# Altium PCB Screw Terminal PCB.PcbDoc
Units mm, origin at the board's own origin, x right, y up, seen from the top; angles counter-clockwise.
Board outline 167.5 x 96 mm, 2 copper layers (Top Layer, Bottom Layer), stack 1.671 mm thick; 8 components, 67 nets, 144 pads, 0 vias.
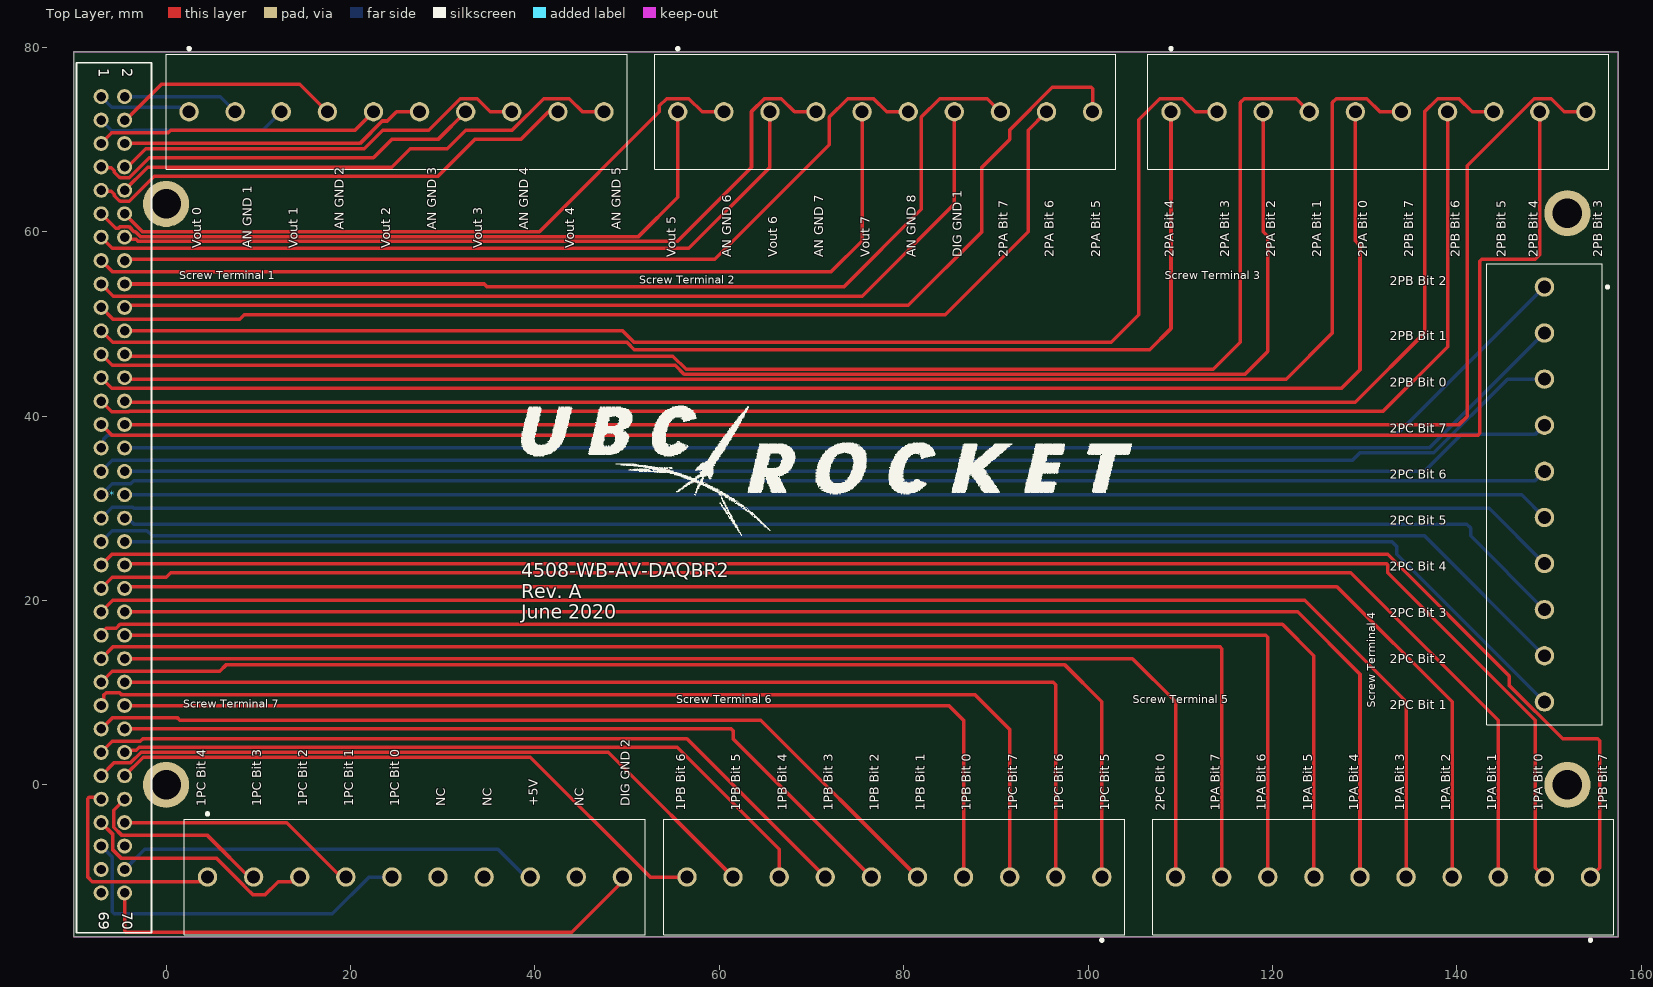
[diagram p0: Top Layer view]
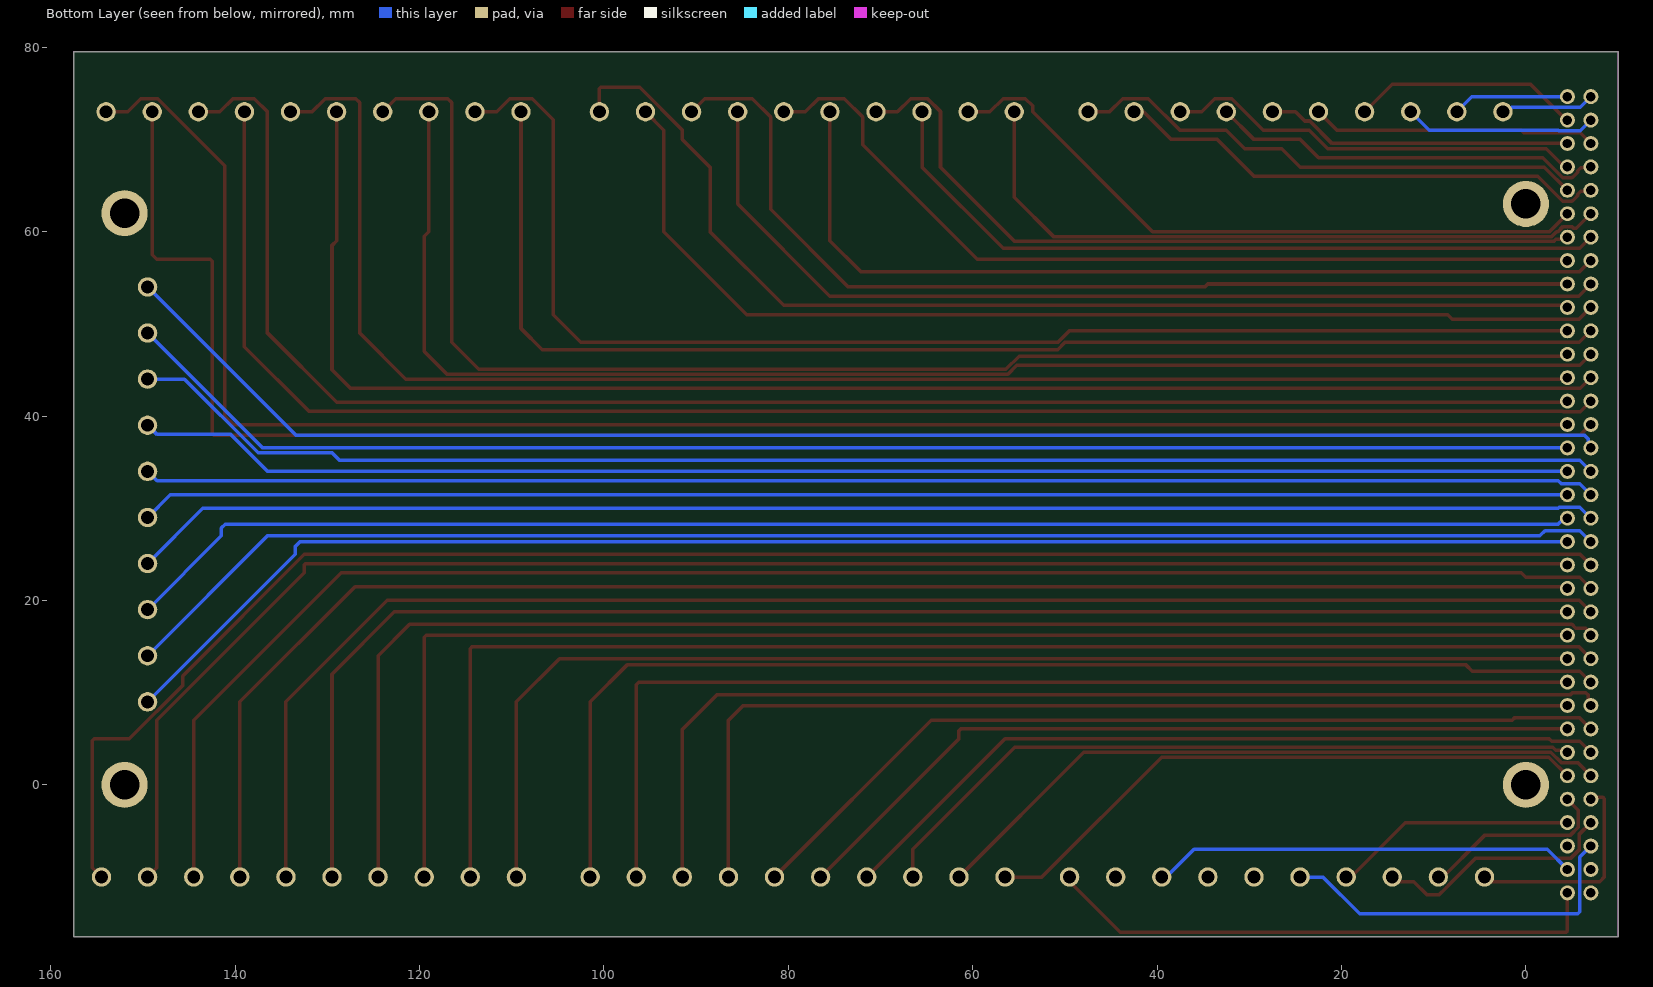
[diagram p1: Bottom Layer view, seen from below]
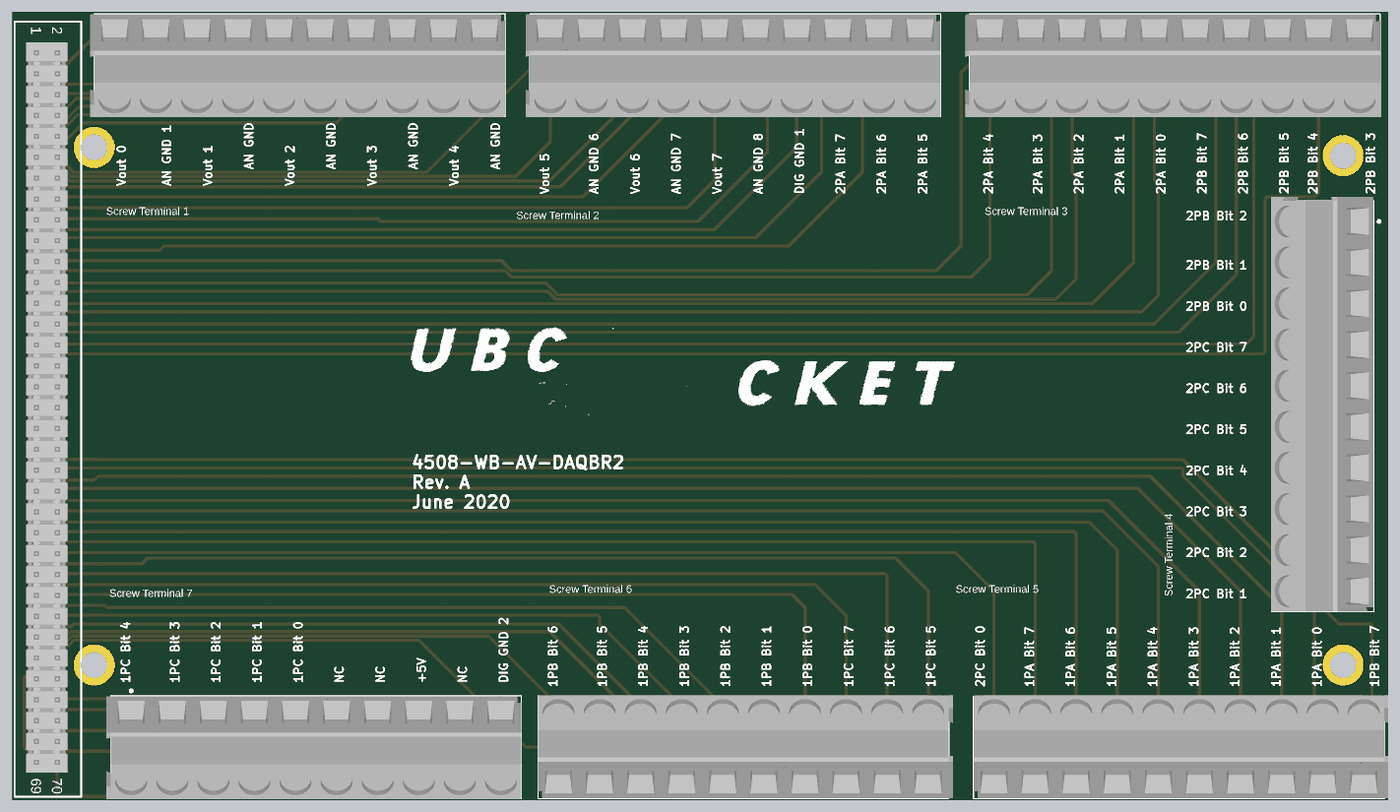
[diagram p2: 3D render of the assembled board from above, using the file's embedded part models]

## Layer stack, top to bottom
Top Solder: solder mask 0.0102, Solder Resist, Dk 3.5
Top Layer: signal copper 0.0356
Dielectric 1: dielectric 1.6, FR-4, Dk 4.8
Bottom Layer: signal copper 0.0356
Bottom Solder: solder mask 0.0102, Solder Resist, Dk 3.5

## Board outline
157.5,79.5 157.5,-16.5 -10,-16.5 -10,79.5

## Design rules (kind name [scope] priority, off if disabled: settings)
Clearance [All] p1: gap=0.152 ignorepadtopadclearanceinfootprint=FALSE except(0: Arc-Hole Track-Hole SMDPad-Hole THPad-Hole Via-Hole Fill-Hole Poly-Hole Region-Hole Text-Hole)
ComponentClearance [All] p1: gap=0 collisioncheckmode=3 verticalgap=0.003 showdistances=FALSE
HoleSize [All] p1: absolutevalues=TRUE maxlimit=25.4 minlimit=0.025 maxpercent=80.000 minpercent=20.000
MinimumSolderMaskSliver [All] p1: minsoldermaskwidth=0.025
PolygonConnect [All] p1: connectstyle=Direct reliefconductorwidth=0.254 reliefentries=4 polygonreliefangle="90 Angle" airgapwidth=0.254
RoomDefinition BMS_REV_A1 [InComponentClass('BMS_REV_A1')] p1: confinementstyle=ConfineIn formatcopy=TRUE lockcomponents=FALSE outline -3.301,-112.466 99.099,-112.466 99.099,-43.967 -3.301,-43.967
RoutingVias [All] p1: holewidth=0.2 width=0.505 viastyle="Through Hole" minholewidth=0.2 minwidth=0.505 maxholewidth=0.711 maxwidth=1.27
SilkToSilkClearance [All] p1: silktosilkclearance=0.025
SilkToSolderMaskClearance [IsPad] p1: minsilkscreentomaskgap=0.025 clearancetoexposedcopper=TRUE
SolderMaskExpansion [All] p1: expansion=0.102 istentingtop=FALSE
Width [All] p1: maxlimit=5.08 minlimit=0.254 preferedwidth=0.381
25 further rules are at their usual default settings.

## Components (designator, comment, footprint, x,y, rotation, side; value= is the part's Value field where it differs from the comment)
* "Header to screw terminals" Header -5.77,31.46 r270 top
"Screw Terminal 1" "1-10" "SCREW TERMINAL" 25,73 r0 top (schematic designator ST1)
"Screw Terminal 2" "10-20" "SCREW TERMINAL" 78,73 r0 top (schematic designator ST2)
"Screw Terminal 3" "20-30" "SCREW TERMINAL" 131.5,73 r0 top (schematic designator ST3)
"Screw Terminal 4" "30-40" "SCREW TERMINAL" 149.5,31.5 r270 top (schematic designator ST4)
"Screw Terminal 5" "40-50" "SCREW TERMINAL" 132,-10 r180 top (schematic designator ST5)
"Screw Terminal 6" "50-60" "SCREW TERMINAL" 79,-10 r180 top (schematic designator ST6)
"Screw Terminal 7" "60-70" "SCREW TERMINAL" 27,-10 r0 top (schematic designator ST7)

## Footprints (in the part's own frame and the unit in brackets; to place one, negate y for a bottom-side part, rotate by r counter-clockwise, add the part's x,y. Pads: shape width x height; smd on the part's side, far side on the other; paste and mask are expansions set on the pad)
Header [mm]
  round 1.62 hole 1.02: 1(-43.18,-1.27) 2(-43.18,1.27) 3(-40.64,-1.27) 4(-40.64,1.27) 5(-38.1,-1.27) 6(-38.1,1.27) 7(-35.56,-1.27) 8(-35.56,1.27) 9(-33.02,-1.27) 10(-33.02,1.27) 11(-30.48,-1.27) 12(-30.48,1.27) 13(-27.94,-1.27) 14(-27.94,1.27) 15(-25.4,-1.27) 16(-25.4,1.27) 17(-22.86,-1.27) 18(-22.86,1.27) 19(-20.32,-1.27) 20(-20.32,1.27) 21(-17.78,-1.27) 22(-17.78,1.27) 23(-15.24,-1.27) 24(-15.24,1.27) 25(-12.7,-1.27) 26(-12.7,1.27) 27(-10.16,-1.27) 28(-10.16,1.27) 29(-7.62,-1.27) 30(-7.62,1.27) 31(-5.08,-1.27) 32(-5.08,1.27) 33(-2.54,-1.27) 34(-2.54,1.27) 35(0,-1.27) 36(0,1.27) 37(2.54,-1.27) 38(2.54,1.27) 39(5.08,-1.27) 40(5.08,1.27) 41(7.62,-1.27) 42(7.62,1.27) 43(10.16,-1.27) 44(10.16,1.27) 45(12.7,-1.27) 46(12.7,1.27) 47(15.24,-1.27) 48(15.24,1.27) 49(17.78,-1.27) 50(17.78,1.27) 51(20.32,-1.27) 52(20.32,1.27) 53(22.86,-1.27) 54(22.86,1.27) 55(25.4,-1.27) 56(25.4,1.27) 57(27.94,-1.27) 58(27.94,1.27) 59(30.48,-1.27) 60(30.48,1.27) 61(33.02,-1.27) 62(33.02,1.27) 63(35.56,-1.27) 64(35.56,1.27) 65(38.1,-1.27) 66(38.1,1.27) 67(40.64,-1.27) 68(40.64,1.27) 69(43.18,-1.27) 70(43.18,1.27)
  silkscreen extent -46.86,-3.94 47.5,4.19, body extent -44.32,-2.51 44.58,2.51, height 7.89
"SCREW TERMINAL" [mm]
  round 2.1 hole 1.4: 1(-22.5,0) 2(-17.5,0) 3(-12.5,0) 4(-7.5,0) 5(-2.5,0) 6(2.5,0) 7(7.5,0) 8(12.5,0) 9(17.5,0) 10(22.5,0)
  silkscreen extent -25,-6.25 25,6.95, body extent -25.5,-6.31 25,6.19, height 10.51

## Part data
*: library part Header
"Screw Terminal 1" "Screw Terminal 2" "Screw Terminal 3" "Screw Terminal 4" "Screw Terminal 5" "Screw Terminal 6" "Screw Terminal 7": library part "Screw Terminal"

## Free pads (board coordinates)
  round 5 hole 3.2: ""(0,0) ""(0,63) ""(152,0) ""(152,62)

## Nets (pads, with @x,y where several pads share a name; then routed paths per layer and width w, separated by ;. In a path a pad name is that pad's centre, name@x,y a point inside that pad or via, vN(x,y) a via of type N, cw(c..) or ccw(c..) an arc to the next point about the centre after c; other vN are vias at no path point)
+5V: "Screw Terminal 7.8" *.68 | length 46.4
  Bottom Layer w0.381: *.68 -2.32,-7 36,-7 39,-10 39.5,-10.5
"Analog Ground 1": "Screw Terminal 1.2" *.2 | length 12.7
  Bottom Layer w0.381: *.2 5.86,74.64 7.5,73
"Analog Ground 2": "Screw Terminal 1.4" *.4 | length 24.9
  Top Layer w0.381: *.4 -4.4,72.1 -0.5,76 14.5,76 17.5,73
"Analog Ground 3": "Screw Terminal 1.6" *.6 | length 33.4
  Top Layer w0.381: *.6 21.03,69.56 23.47,72 24,72 25,73 27.5,73
"Analog Ground 4": "Screw Terminal 1.8" *.8 | length 45.7
  Top Layer w0.381: *.8 -4.165,67.02 -2.185,69 21.5,69 23.5,71 28.476,71 31.907,74.431 33.738,74.431 35.169,73 37.5,73
"Analog Ground 5": "Screw Terminal 1.10" *.10 | length 56.7
  Top Layer w0.381: *.10 -1.98,67 24.5,67 26.5,69 30.5,69 32.5,71 37.524,71 40.955,74.431 43.738,74.431 45.169,73 47.5,73
"Analog Ground 6": "Screw Terminal 2.2" *.12 | length 72.7
  Top Layer w0.381: *.12 -2.56,60 40.5,60 53.5,73 53.5,73.639 54.292,74.431 56.708,74.431 58.139,73 60.5,73
"Analog Ground 7": "Screw Terminal 2.4" *.14 | length 85.7
  Top Layer w0.381: *.14 -4.263,59.163 -3.232,59.163 -3.002,58.933 55.433,58.933 63.5,67 63.5,73.024 64.907,74.431 66.738,74.431 68.169,73 70.5,73
"Analog Ground 8": "Screw Terminal 2.6" *.16 | length 94.6
  Top Layer w0.381: *.16 -4.36,57 59.5,57 71.931,69.431 71.931,72.431 73.931,74.431 76.738,74.431 78.169,73 80.5,73
"Digital Ground 1": "Screw Terminal 2.7" *.17 | length 107.2
  Top Layer w0.381: *.17 -5.72,53 75.5,53 85.5,63 85.5,73
"Digital Ground 2": "Screw Terminal 7.10" *.70 | length 60.5
  Top Layer w0.381: *.70 -4.5,-15.851 -4.351,-16 44,-16 49.5,-10.5
"FIRSTPORTA Bit 0": "Screw Terminal 5.9" *.49 | length 147
  Top Layer w0.381: *.49 -5.72,15 114.277,15 114.5,14.777 114.5,-10
"FIRSTPORTA Bit 1": "Screw Terminal 5.8" *.48 | length 150.1
  Top Layer w0.381: *.48 119.28,16.22 119.5,16 119.5,-10
"FIRSTPORTA Bit 2": "Screw Terminal 5.7" *.47 | length 157.6
  Top Layer w0.381: *.47 -7.04,16.46 -6.5,17 -5.404,17 -4.993,17.411 121.089,17.411 124.5,14 124.5,-10
"FIRSTPORTA Bit 3": "Screw Terminal 5.6" *.46 | length 158.8
  Top Layer w0.381: *.46 122.74,18.76 129.5,12 129.5,-10
"FIRSTPORTA Bit 4": "Screw Terminal 5.5" *.45 | length 165.6
  Top Layer w0.381: *.45 -5.789,20.011 123.489,20.011 134.5,9 134.5,-10
"FIRSTPORTA Bit 5": "Screw Terminal 5.4" *.44 | length 168.3
  Top Layer w0.381: *.44 -4.3,21.5 127,21.5 139.5,9 139.5,-10
"FIRSTPORTA Bit 6": "Screw Terminal 5.3" *.43 | length 175.9
  Top Layer w0.381: *.43 -5.832,22.508 0.008,22.508 0.5,23 128.5,23 144.5,7 144.5,-10
"FIRSTPORTA Bit 7": "Screw Terminal 5.2" *.42 | length 178
  Top Layer w0.381: *.42 -4.34,24 132.351,24 132.5,23.851 132.5,23 148.5,7 148.5,-9 149.5,-10
"FIRSTPORTB Bit 0": "Screw Terminal 6.7" *.57 | length 85.4
  Top Layer w0.381: *.57 -5.849,4.711 -2.789,4.711 -2.5,5 56.5,5 71.5,-10
"FIRSTPORTB Bit 1": "Screw Terminal 6.6" *.56 | length 88.2
  Top Layer w0.381: *.56 61.291,6.06 61.5,5.851 61.5,5 76.5,-10
"FIRSTPORTB Bit 2": "Screw Terminal 6.5" *.55 | length 96.2
  Top Layer w0.381: *.55 -5.849,7.251 1.249,7.251 1.5,7 64.5,7 81.5,-10
"FIRSTPORTB Bit 3": "Screw Terminal 6.4" *.54 | length 108.7
  Top Layer w0.381: *.54 84.9,8.6 86.5,7 86.5,-10
"FIRSTPORTB Bit 4": "Screw Terminal 6.3" *.53 | length 117.3
  Top Layer w0.381: *.53 -6.779,8.861 -6.779,9.717 -6.498,9.998 -5.042,9.998 -4.835,9.791 87.709,9.791 91.5,6 91.5,-10
"FIRSTPORTB Bit 5": "Screw Terminal 6.2" *.52 | length 122
  Top Layer w0.381: *.52 96.211,11.14 96.5,10.851 96.5,-10
"FIRSTPORTB Bit 6": "Screw Terminal 6.1" *.51 | length 130
  Top Layer w0.381: *.51 -5.849,12.331 5.831,12.331 6.5,13 97.5,13 101.5,9 101.5,-10
"FIRSTPORTB Bit 7": "Screw Terminal 5.10" *.50 | length 134.9
  Top Layer w0.381: *.50 104.82,13.68 109.5,9 109.5,-10
"FIRSTPORTC Bit 0": "Screw Terminal 7.5" *.65 | length 39.7
  Bottom Layer w0.381: *.65 -5.849,-7.831 -5.849,-13.777 -5.626,-14 18.024,-14 22.024,-10 24.5,-10
"FIRSTPORTC Bit 1": "Screw Terminal 7.4" *.64 | length 26.7
  Top Layer w0.381: *.64 13.1,-4.1 19.5,-10.5
"FIRSTPORTC Bit 2": "Screw Terminal 7.3" *.63 | length 26.4
  Top Layer w0.381: *.63 -5.807,-5.333 -5.807,-7.017 -4.835,-7.989 5.489,-7.989 8.345,-10.845 ccw(c9.5,-10) 8.655,-11.155 9.431,-11.931 10.738,-11.931 12.169,-10.5 14.5,-10.5
"FIRSTPORTC Bit 3": "Screw Terminal 7.2" *.62 | length 21.2
  Top Layer w0.381: *.62 -5.691,-2.751 -5.691,-4.593 -4.835,-5.449 4.449,-5.449 9.5,-10.5
"FIRSTPORTC Bit 4": "Screw Terminal 7.1" *.61 | length 23.3
  Top Layer w0.381: *.61 -7.241,-1.359 -8.351,-1.359 -8.5,-1.508 -8.5,-10 -8,-10.5 4.5,-10.5
"FIRSTPORTC Bit 5": "Screw Terminal 6.10" *.60 | length 67.2
  Top Layer w0.381: *.60 -2.48,3 39.5,3 52.5,-10 56.5,-10
"FIRSTPORTC Bit 6": "Screw Terminal 6.9" *.59 | length 75.2
  Top Layer w0.381: *.59 -5.653,2.367 -3.867,2.367 -2.701,3.533 47.967,3.533 61.5,-10
"FIRSTPORTC Bit 7": "Screw Terminal 6.8" *.58 | length 78.8
  Top Layer w0.381: *.58 -4.263,3.757 -3.232,3.757 -2.922,4.067 55.433,4.067 66.5,-7 66.5,-10
"SECONDPORTA Bit 0": "Screw Terminal 3.5" *.25 | length 166.1
  Top Layer w0.381: *.25 -5.88,43 127.5,43 129.5,45 129.5,58.5 129,59 129,73
"SECONDPORTA Bit 1": "Screw Terminal 3.4" *.24 | length 157.2
  Top Layer w0.381: *.24 -4.3,46.5 54.975,46.5 56.408,45.067 113.567,45.067 116.5,48 116.5,74 116.931,74.431 122.569,74.431 124,73
"SECONDPORTA Bit 2": "Screw Terminal 3.3" *.23 | length 154.7
  Top Layer w0.381: *.23 -5.84,45.5 55.214,45.5 56.181,44.533 117.033,44.533 119.5,47 119.5,59.5 119,60 119,73
"SECONDPORTA Bit 3": "Screw Terminal 3.2" *.22 | length 142.9
  Top Layer w0.381: *.22 49.513,49.24 50.753,48 102.5,48 105.5,51 105.5,72.139 107.792,74.431 110.208,74.431 111.639,73 114,73
"SECONDPORTA Bit 4": "Screw Terminal 3.1" *.21 | length 141.3
  Top Layer w0.381: *.21 -5.8,48 49.999,48 50.791,47.208 106.708,47.208 109,49.5 109,73
"SECONDPORTA Bit 5": "Screw Terminal 2.10" *.20 | length 122.1
  Top Layer w0.381: *.20 -4.28,52 80.5,52 88.5,60 88.5,67 91.5,70 91.5,71.024 96.117,75.641 100.351,75.641 100.5,75.492 100.5,73
"SECONDPORTA Bit 6": "Screw Terminal 2.9" *.19 | length 118.8
  Top Layer w0.381: *.19 -5.76,50.5 8,50.5 8.5,51 84.5,51 93.5,60 93.5,71 95.5,73
"SECONDPORTA Bit 7": "Screw Terminal 2.8" *.18 | length 110
  Top Layer w0.381: *.18 34.525,54.32 34.845,54 73.5,54 81.931,62.431 81.931,72.431 83.931,74.431 89.069,74.431 90.5,73
"SECONDPORTB Bit 0": "Screw Terminal 4.3" *.33 | length 160.7
  Bottom Layer w0.381: *.33 -5.849,35.191 128.691,35.191 129.5,36 137.5,36 145.5,44 149.5,44
"SECONDPORTB Bit 1": "Screw Terminal 4.2" *.32 | length 159.2
  Bottom Layer w0.381: *.32 137.04,36.54 149.5,49
"SECONDPORTB Bit 2": "Screw Terminal 4.1" *.31 | length 164.2
  Bottom Layer w0.381: *.31 -6.779,36.801 -6.779,37.499 -6.389,37.889 133.389,37.889 149.5,54
"SECONDPORTB Bit 3": "Screw Terminal 3.10" *.30 | length 189.7
  Top Layer w0.381: *.30 140.243,39.08 141.118,39.954 141.118,67.141 148.407,74.431 150.238,74.431 151.669,73 154,73
"SECONDPORTB Bit 4": "Screw Terminal 3.9" *.29 | length 191.1
  Top Layer w0.381: *.29 -5.849,37.889 142.277,37.889 142.5,38.112 142.5,56.777 142.723,57 148.5,57 149,57.5 149,73
"SECONDPORTB Bit 5": "Screw Terminal 3.8" *.28 | length 176.8
  Top Layer w0.381: *.28 -4.38,41.5 129,41.5 136.5,49 136.5,73 137.931,74.431 140.238,74.431 141.669,73 144,73
"SECONDPORTB Bit 6": "Screw Terminal 3.7" *.27 | length 174.9
  Top Layer w0.381: *.27 -5.887,40.467 -4.022,40.467 -3.99,40.5 132,40.5 139,47.5 139,73
"SECONDPORTB Bit 7": "Screw Terminal 3.6" *.26 | length 166.4
  Top Layer w0.381: *.26 -4.34,44 121.5,44 126.5,49 126.5,74 126.931,74.431 130.238,74.431 131.669,73 134,73
"SECONDPORTC Bit 0": "Screw Terminal 5.1" *.41 | length 187.2
  Top Layer w0.381: *.41 -5.849,25.031 0.469,25.031 0.5,25 132.5,25 145.704,11.796 145.704,10.773 151.476,5 155.277,5 155.5,4.777 155.5,-9 154.5,-10
"SECONDPORTC Bit 1": "Screw Terminal 4.10" *.40 | length 161.7
  Bottom Layer w0.381: *.40 132.971,26.38 133.5,25.851 133.5,25 149.5,9
"SECONDPORTC Bit 2": "Screw Terminal 4.9" *.39 | length 162.7
  Bottom Layer w0.381: *.39 -5.849,27.571 -2.071,27.571 -1.5,27 136.5,27 149.5,14
"SECONDPORTC Bit 3": "Screw Terminal 4.8" *.38 | length 158.6
  Bottom Layer w0.381: *.38 -4.146,28.92 -3.481,28.255 141.096,28.255 141.5,27.851 141.5,27 149.5,19
"SECONDPORTC Bit 4": "Screw Terminal 4.7" *.37 | length 159.6
  Bottom Layer w0.381: *.37 -5.849,30.111 -3.611,30.111 -3.5,30 143.5,30 149.5,24
"SECONDPORTC Bit 5": "Screw Terminal 4.6" *.36 | length 155
  Bottom Layer w0.381: *.36 147.04,31.46 149.5,29
"SECONDPORTC Bit 6": "Screw Terminal 4.5" *.35 | length 157.6
  Bottom Layer w0.381: *.35 -5.849,32.651 -3.849,32.651 -3.5,33 148.476,33 149.476,34 149.5,34
"SECONDPORTC Bit 7": "Screw Terminal 4.4" *.34 | length 156.1
  Bottom Layer w0.381: *.34 136.5,34 140.5,38 148.476,38 149.476,39 149.5,39
"Vout 0": "Screw Terminal 1.1" *.1 | length 10.2
  Bottom Layer w0.381: *.1 -5.887,73.487 -4.022,73.487 -4.01,73.5 1.535,73.5 2.035,73 2.5,73
"Vout 1": "Screw Terminal 1.3" *.3 | length 20.9
  Bottom Layer w0.381: *.3 -5.887,70.947 -3.553,70.947 -3.5,71 10.5,71 12.5,73
"Vout 2": "Screw Terminal 1.5" *.5 | length 31
  Top Layer w0.381: *.5 -5.887,70.713 0.213,70.713 0.5,71 20.5,71 22.5,73
"Vout 3": "Screw Terminal 1.7" *.7 | length 43.1
  Top Layer w0.381: *.7 -6.949,66.929 -5.939,66.929 -5.617,66.607 -5.617,66.453 -5.342,66.178 -4.993,65.829 -4.5,65.829 -4.007,65.829 -3.658,66.178 -1.836,68 22.5,68 24.5,70 29.5,70 32.5,73
"Vout 4": "Screw Terminal 1.9" *.9 | length 54.1
  Top Layer w0.381: *.9 -6.949,64.389 -5.939,64.389 -5.617,64.067 -5.617,63.913 -5.342,63.638 -4.993,63.289 -4.5,63.289 -4.007,63.289 -1.296,66 29.5,66 33.5,70 38.489,70 41.489,73 42.5,73
"Vout 5": "Screw Terminal 2.1" *.11 | length 74.8
  Top Layer w0.381: *.11 -5.473,60.373 -5.157,60.373 -4.978,60.553 -4.022,60.553 -3.47,60 -3.314,60 -2.781,59.467 51.248,59.467 55.5,63.718 55.5,73
"Vout 6": "Screw Terminal 2.3" *.13 | length 82.7
  Top Layer w0.381: *.13 -5.849,58.209 56.709,58.209 65.5,67 65.5,73
"Vout 7": "Screw Terminal 2.5" *.15 | length 98.4
  Top Layer w0.381: *.15 -5.849,55.669 72.169,55.669 75.5,59 75.5,73
pads on no net: "Screw Terminal 7.6" "Screw Terminal 7.7" "Screw Terminal 7.9" *.66 *.67 *.69

## Keep-outs
Keep-Out Layer:
  the board outline again, w0.1

## Silkscreen, mask and mechanical layers (free items; w line width, h text height)
Top Overlay:
  drawing of 28 lines, arcs and shapes, not listed
  text "AN GND 2" at 19.3,60.2 h1 r90
  text "AN GND 3" at 29.3,60.2 h1 r90
  text "AN GND 4" at 39.3,60.2 h1 r90
  text "AN GND 5" at 49.3,60.2 h1 r90
  text "Vout 0" at 3.8,58.2 h1 r90
  text "AN GND 1" at 9.3,58.2 h1 r90
  text "Vout 1" at 14.3,58.2 h1 r90
  text "Vout 2" at 24.3,58.2 h1 r90
  text "Vout 3" at 34.3,58.2 h1 r90
  text "Vout 4" at 44.3,58.2 h1 r90
  text "Vout 5" at 55.3,57.2 h1 r90
  text "AN GND 6" at 61.3,57.2 h1 r90
  text "Vout 6" at 66.3,57.2 h1 r90
  text "AN GND 7" at 71.3,57.2 h1 r90
  text "Vout 7" at 76.3,57.2 h1 r90
  text "AN GND 8" at 81.3,57.2 h1 r90
  text "DIG GND 1" at 86.3,57.2 h1 r90
  text "2PA Bit 7" at 91.3,57.2 h1 r90
  text "2PA Bit 6" at 96.3,57.2 h1 r90
  text "2PA Bit 5" at 101.3,57.2 h1 r90
  text "2PA Bit 4" at 109.3,57.2 h1 r90
  text "2PA Bit 3" at 115.3,57.2 h1 r90
  text "2PA Bit 2" at 120.3,57.2 h1 r90
  text "2PA Bit 1" at 125.3,57.2 h1 r90
  text "2PA Bit 0" at 130.3,57.2 h1 r90
  text "2PB Bit 7" at 135.3,57.2 h1 r90
  text "2PB Bit 6" at 140.3,57.2 h1 r90
  text "2PB Bit 5" at 145.3,57.2 h1 r90
  text "2PB Bit 4" at 148.8,57.2 h1 r90
  text "2PB Bit 3" at 155.8,57.2 h1 r90
  text "2PB Bit 2" at 132.7,54.2 h1
  text "2PB Bit 1" at 132.7,48.2 h1
  text "2PB Bit 0" at 132.7,43.2 h1
  text "2PC Bit 7" at 132.7,38.2 h1
  text "2PC Bit 6" at 132.7,33.2 h1
  text "2PC Bit 5" at 132.7,28.2 h1
  text "2PC Bit 4" at 132.7,23.2 h1
  text "2PC Bit 3" at 132.7,18.2 h1
  text "4508-WB-AV-DAQBR2 / Rev. A / June 2020" at 38.5,18 h1.5
  text "2PC Bit 2" at 132.7,13.2 h1
  text "2PC Bit 1" at 132.7,8.2 h1
  text "1PC Bit 4" at 4.3,-2.3 h1 r90
  text "1PC Bit 3" at 10.3,-2.3 h1 r90
  text "1PC Bit 2" at 15.3,-2.3 h1 r90
  text "1PC Bit 1" at 20.3,-2.3 h1 r90
  text "1PC Bit 0" at 25.3,-2.3 h1 r90
  text "NC" at 30.3,-2.3 h1 r90
  text "NC" at 35.3,-2.3 h1 r90
  text "+5V" at 40.3,-2.3 h1 r90
  text "NC" at 45.3,-2.3 h1 r90
  text "DIG GND 2" at 50.3,-2.3 h1 r90
  text "1PB Bit 6" at 56.3,-2.8 h1 r90
  text "1PB Bit 5" at 62.3,-2.8 h1 r90
  text "1PB Bit 4" at 67.3,-2.8 h1 r90
  text "1PB Bit 3" at 72.3,-2.8 h1 r90
  text "1PB Bit 2" at 77.3,-2.8 h1 r90
  text "1PB Bit 1" at 82.3,-2.8 h1 r90
  text "1PB Bit 0" at 87.3,-2.8 h1 r90
  text "1PC Bit 7" at 92.3,-2.8 h1 r90
  text "1PC Bit 6" at 97.3,-2.8 h1 r90
  text "1PC Bit 5" at 102.3,-2.8 h1 r90
  text "2PC Bit 0" at 108.3,-2.8 h1 r90
  text "1PA Bit 7" at 114.3,-2.8 h1 r90
  text "1PA Bit 6" at 119.3,-2.8 h1 r90
  text "1PA Bit 5" at 124.3,-2.8 h1 r90
  text "1PA Bit 4" at 129.3,-2.8 h1 r90
  text "1PA Bit 3" at 134.3,-2.8 h1 r90
  text "1PA Bit 2" at 139.3,-2.8 h1 r90
  text "1PA Bit 1" at 144.3,-2.8 h1 r90
  text "1PA Bit 0" at 149.3,-2.8 h1 r90
  text "1PB Bit 7" at 156.3,-2.8 h1 r90

## Text inside footprints (layer, text, board x,y; h text height)
*: Mechanical 40 "86.360" at -0.817,32.26 h0.39 r270; Mechanical 40 "88.900" at -10.146,32.26 h0.39 r270; Mechanical 40 "2.540" at -1.833,77.269 h0.39 r270; Mechanical 40 "2.540" at -5.897,80.952 h0.39 r270; Mechanical 40 "5.029" at -5.897,82.819 h0.39 r270; Top Overlay "70" at -5.135,-13.781 h1.97 r270; Top Overlay "69" at -7.675,-13.781 h1.97 r270; Top Overlay "2" at -5.135,77.73 h1.97 r270; Top Overlay "1" at -7.675,77.73 h1.97 r270; Mechanical 16 "70" at -5.135,-13.781 h1.97 r270; Mechanical 16 "69" at -7.675,-13.781 h1.97 r270; Mechanical 16 "2" at -5.135,77.73 h1.97 r270; Mechanical 16 "1" at -7.675,77.73 h1.97 r270